# Altium PCB Power_Controller.PcbDoc
Units mm, origin at the board's own origin, x right, y up, seen from the top; angles counter-clockwise.
Board outline 65.2 x 40.2 mm, 2 copper layers (Top Layer, Bottom Layer); 6 components, 6 nets, 22 pads, 0 vias.
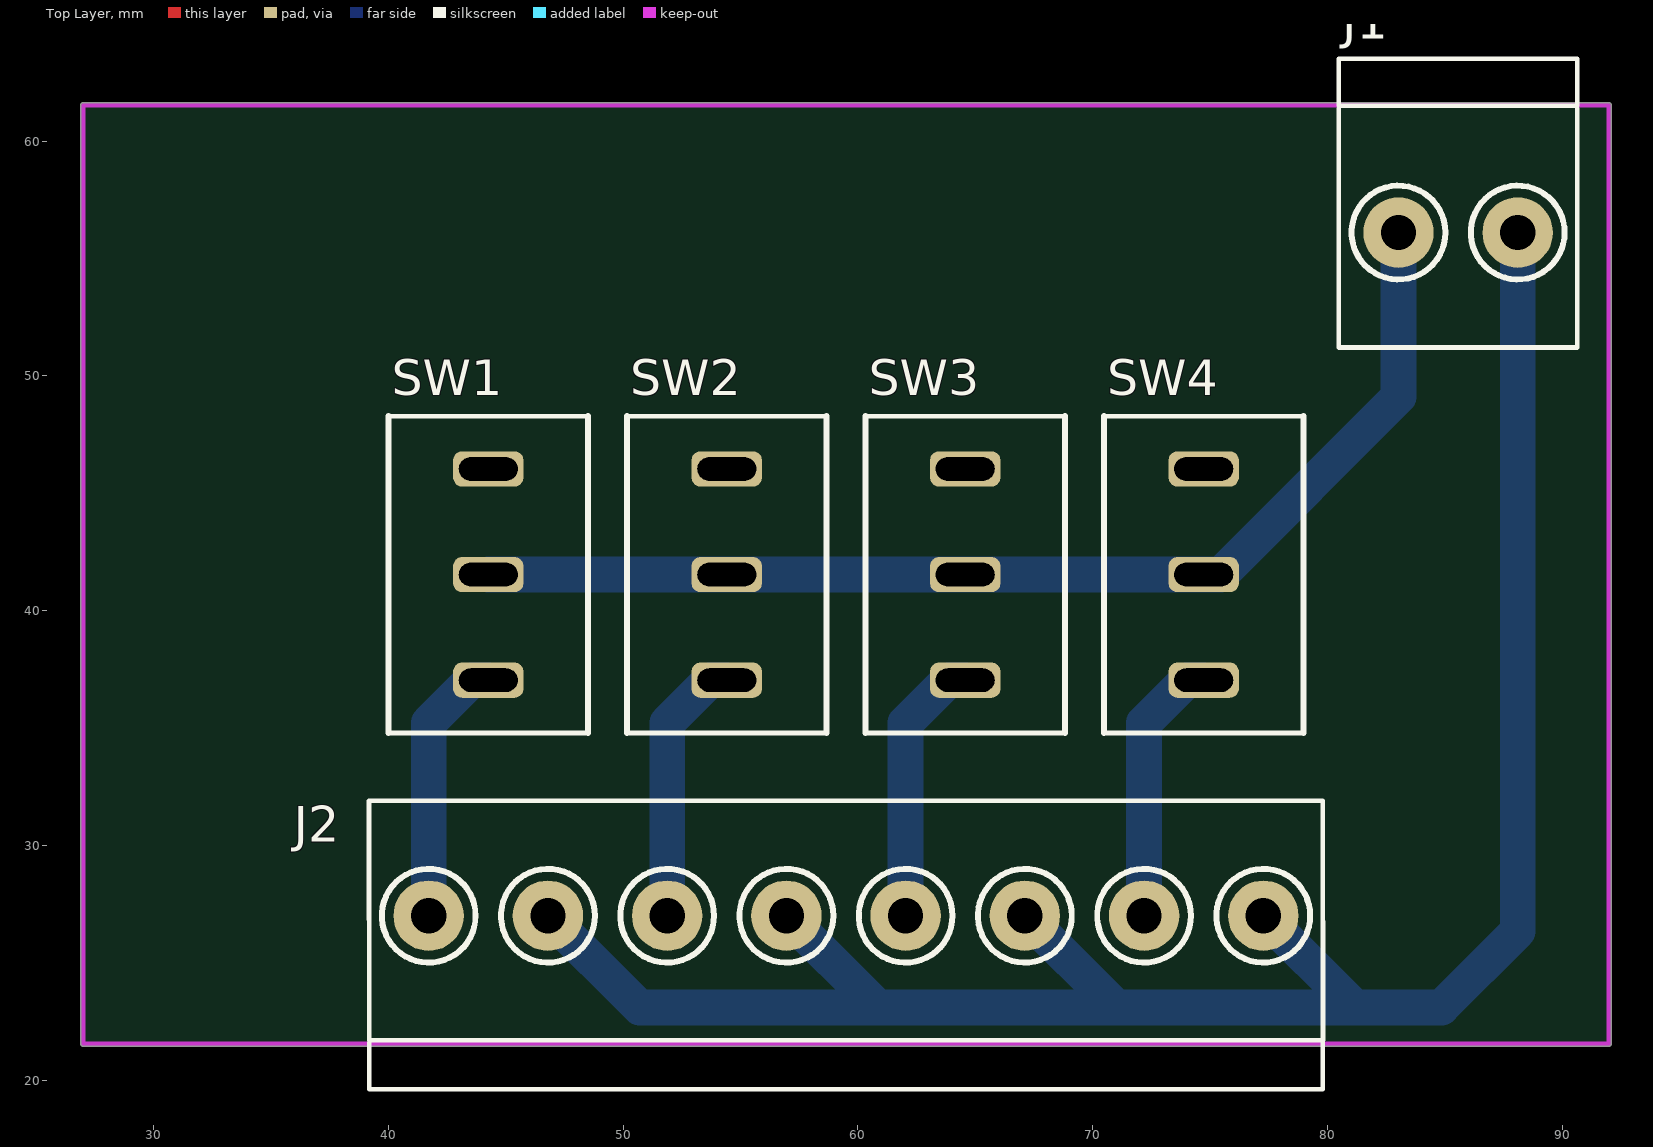
[diagram p0: Top Layer view]
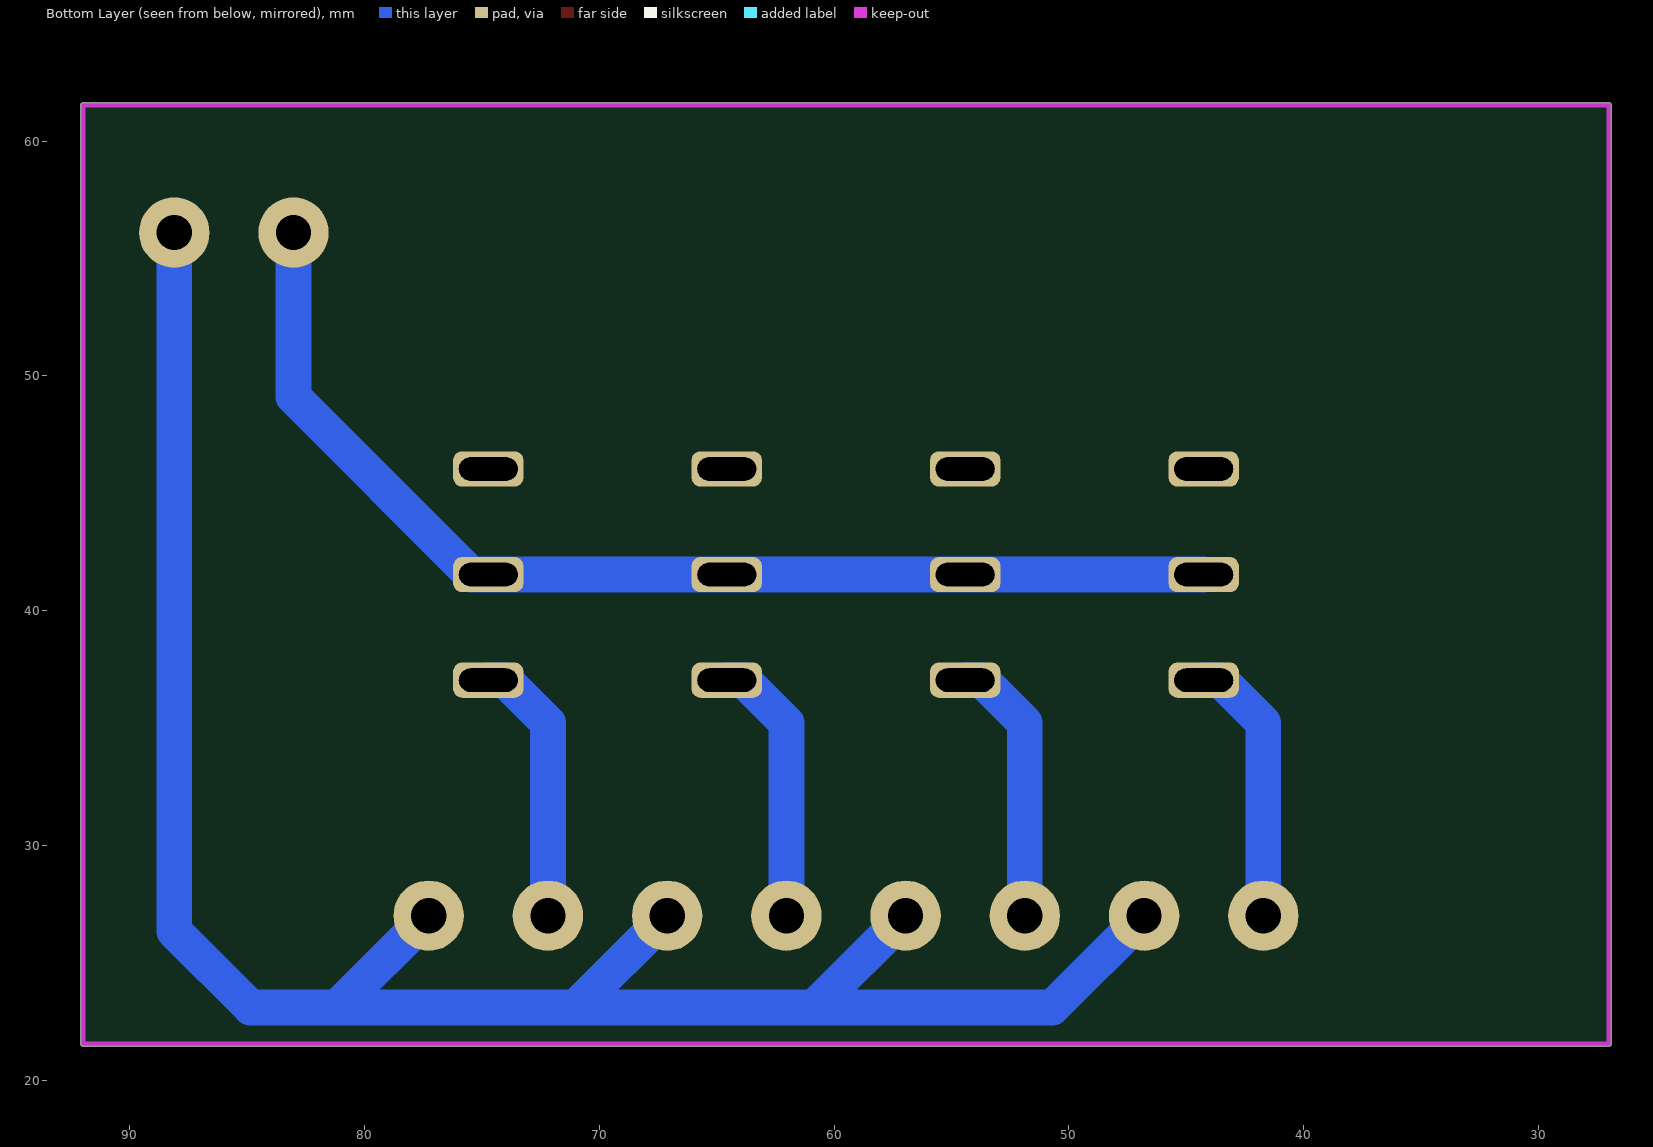
[diagram p1: Bottom Layer view, seen from below]

## Layer stack, top to bottom
Top Solder: solder mask 0.0102, Solder Resist, Dk 3.5
Top Layer: signal copper 0.0356
Dielectric 1: dielectric 0.32, FR-4, Dk 4.8
Bottom Layer: signal copper 0.0356
Bottom Solder: solder mask 0.0102, Solder Resist, Dk 3.5

## Board outline
26.891,21.536 ccw(c26.992,21.536) 26.992,21.435 91.992,21.435 ccw(c91.992,21.536) 92.092,21.536 92.092,61.536 ccw(c91.992,61.536) 91.992,61.636 26.992,61.636 ccw(c26.992,61.536) 26.891,61.536

## Design rules (kind name [scope] priority, off if disabled: settings)
Clearance [All] p1: gap=0.254 ignorepadtopadclearanceinfootprint=FALSE except(0: Arc-Hole Track-Hole SMDPad-Hole THPad-Hole Via-Hole Fill-Hole Poly-Hole Region-Hole Text-Hole)
PolygonConnect [All] p1: connectstyle=Relief reliefconductorwidth=0.254 reliefentries=4 polygonreliefangle="90 Angle" airgapwidth=0.254
RoutingVias [All] p1: holewidth=0.711 width=1.27 viastyle="Through Hole" minholewidth=0.711 minwidth=1.27 maxholewidth=0.711 maxwidth=1.27
SolderMaskExpansion [All] p1: expansion=0.102 istentingtop=FALSE
Width [All] p1: maxlimit=1.524 minlimit=0.254 preferedwidth=0.762 minimp=50.000000 maximp=50.000000 favimp=50.000000
30 further rules are at their usual default settings.

## Components (designator, comment, footprint, x,y, rotation, side; value= is the part's Value field where it differs from the comment)
J1 "Terminal_Block" terminal_block_2P_V2 88.113,56.109 r180 top
J2 "Terminal_Block_4P" terminal_block_4P 41.711,27 r0 top
SW1 "Toggle_Switch" T_Switch_V1 44.251,41.536 r0 top
SW2 "Toggle_Switch" T_Switch_V1 54.411,41.536 r0 top
SW3 "Toggle_Switch" T_Switch_V1 64.571,41.536 r0 top
SW4 "Toggle_Switch" T_Switch_V1 74.731,41.536 r0 top

## Footprints (in the part's own frame and the unit in brackets; to place one, negate y for a bottom-side part, rotate by r counter-clockwise, add the part's x,y. Pads: shape width x height; smd on the part's side, far side on the other; paste and mask are expansions set on the pad)
T_Switch_V1 [mm] "Toggle_Switch"
  rrect50% 3x1.5 hole 1 slot 2.5 at 0 deg: 1(0,4.5) 2(0,0) 3(0,-4.5)
  silkscreen extent -4.25,-6.75 4.25,6.75
terminal_block_2P_V2 [mm] "可放字"
  round 3 hole 1.5 paste+0 mask+0.051: 1(0,0) 2(5.08,0)
  silkscreen extent -2.54,-7.4 7.62,4.9
terminal_block_4P [mm]
  round 3 hole 1.5 paste+0 mask+0.051: 1(0,0) 2(5.08,0) 3(10.16,0) 4(15.24,0) 5(20.32,0) 6(25.4,0) 7(30.48,0) 8(35.56,0)
  silkscreen extent -2.54,-7.4 38.1,4.9

## Part data
J1: library part Terminal_Block_2P
SW1 SW2 SW3 SW4: library part Switch_T

## Nets (pads, with @x,y where several pads share a name; then routed paths per layer and width w, separated by ;. In a path a pad name is that pad's centre, name@x,y a point inside that pad or via, vN(x,y) a via of type N, cw(c..) or ccw(c..) an arc to the next point about the centre after c; other vN are vias at no path point)
CH1: J2.1 SW1.3 | length 11.5
  Bottom Layer w1.524: J2.1 41.711,35.222 43.525,37.036 SW1.3
CH2: J2.3 SW2.3 | length 11.5
  Bottom Layer w1.524: J2.3 51.871,35.222 53.685,37.036 SW2.3
CH3: J2.5 SW3.3 | length 11.5
  Bottom Layer w1.524: J2.5 62.031,35.222 63.845,37.036 SW3.3
CH4: J2.7 SW4.3 | length 11.5
  Bottom Layer w1.524: J2.7 72.191,35.222 74.005,37.036 SW4.3
GND: J1.1 J2.2 J2.4 J2.6 J2.8 | length 90.7
  Bottom Layer w1.524: J2.2 50.703,23.089 60.863,23.089 ; J2.4 60.863,23.089 ; J2.6 71.023,23.089 ; J2.8 81.183,23.089 ; J1.1 88.113,26.34 84.861,23.089 81.183,23.089 ; 60.863,23.089 71.023,23.089 ; 71.023,23.089 81.183,23.089
Vin: J1.2 SW1.2 SW2.2 SW3.2 SW4.2 | length 48.9
  Bottom Layer w1.524: SW1.2 SW2.2 SW3.2 SW4.2 75.457,41.536 83.033,49.111 J1.2
pads on no net: SW1.1 SW2.1 SW3.1 SW4.1

## Keep-outs
Keep-Out Layer:
  lines w0.2: 59.492,61.536 26.992,61.536 ; 26.992,61.536 91.992,61.536 91.992,21.536 26.992,21.536 26.992,61.536

## Silkscreen, mask and mechanical layers (free items; w line width, h text height)
Mechanical 1:
  lines w0.2: 14.492,41.536 104.492,41.536 ; 41.711,27 46.791,27 ; 51.871,27 56.951,27 ; 59.492,6.536 59.492,76.536 ; 62.031,27 67.111,27 ; 72.191,27 77.271,27